# Allegro board avrusb500_3.brd
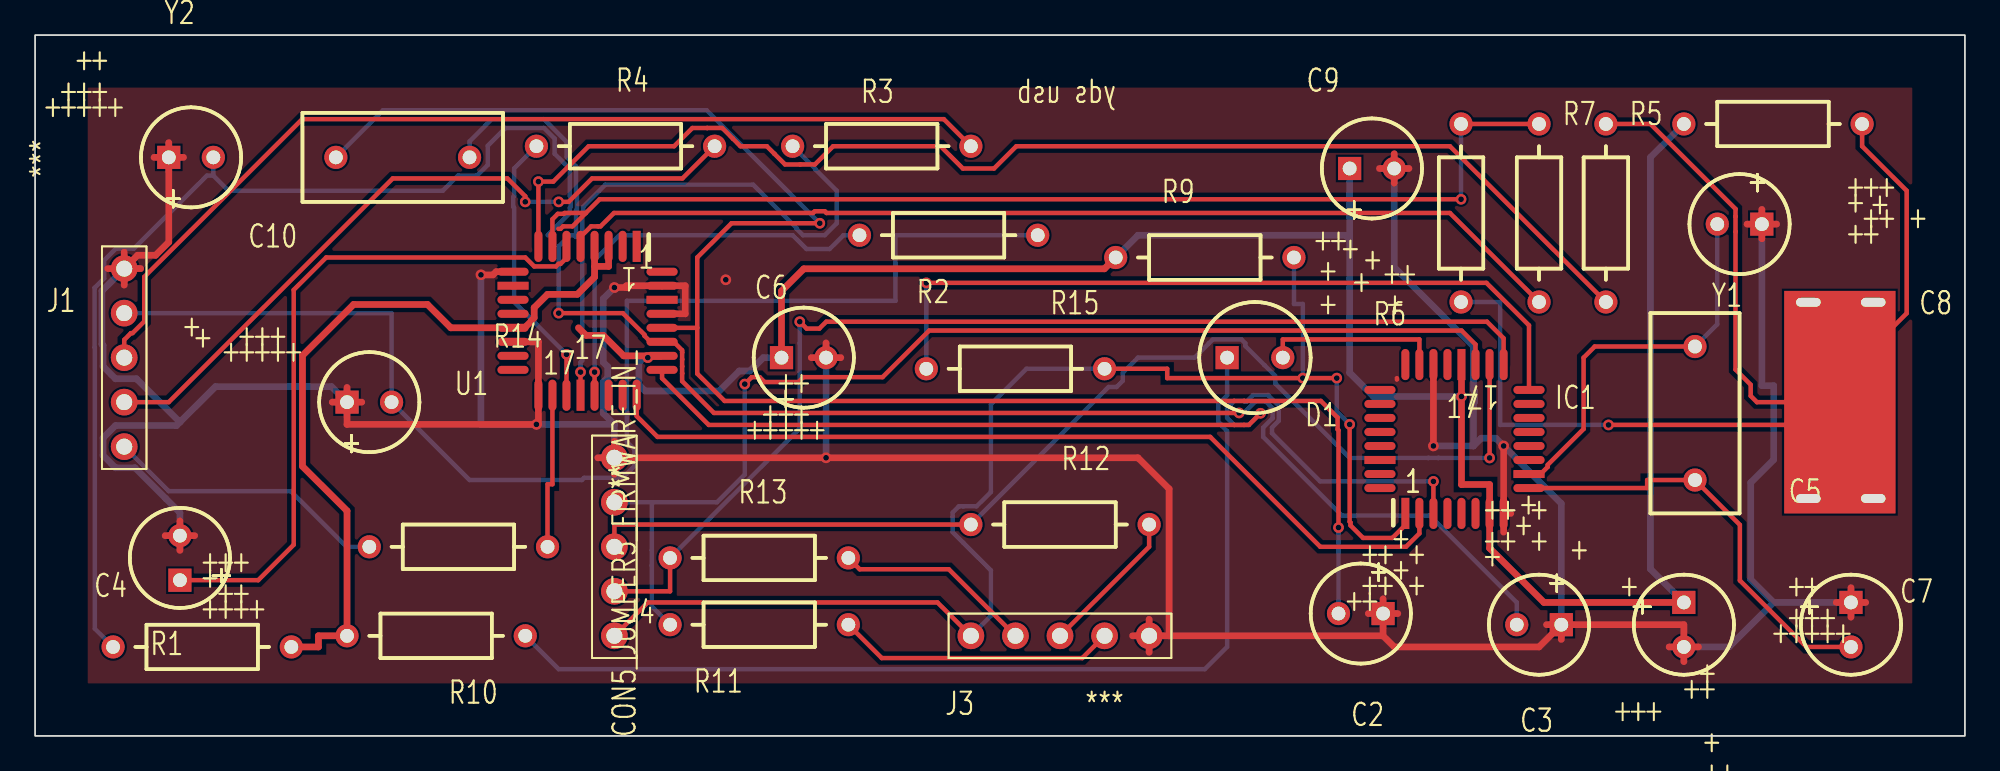
[diagram p0: board, top side]
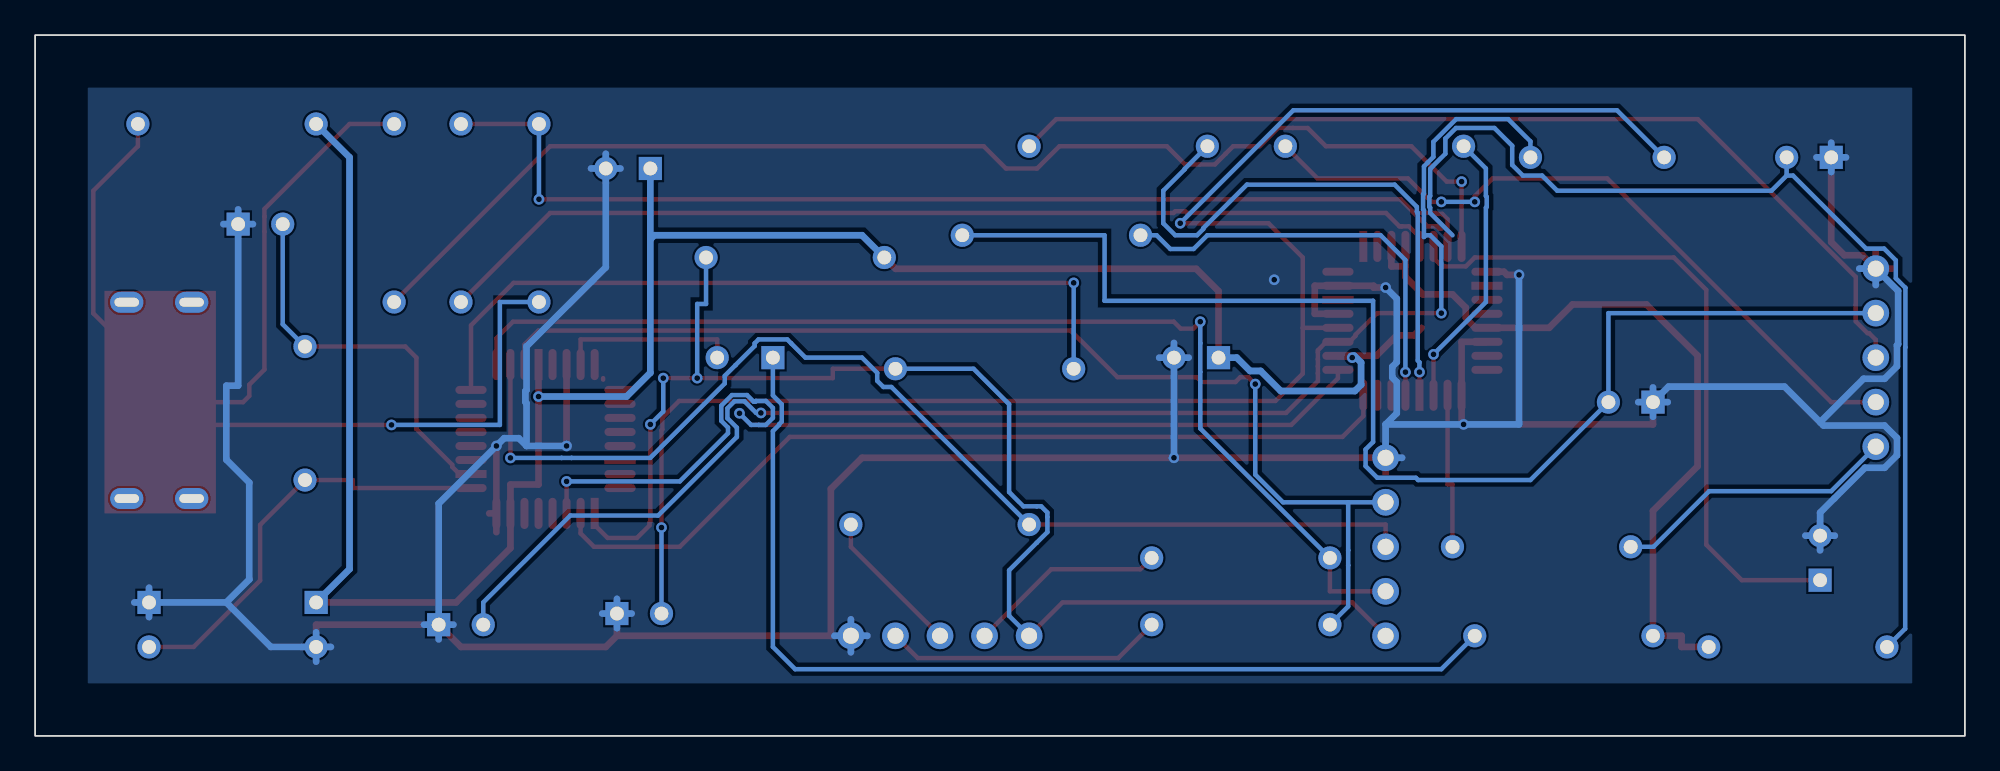
[diagram p1: board, bottom side, seen from below]

Outline 110 x 40 mm; copper layers: TOP, BOTTOM. Coordinates in mm from the lower left corner of the outline.
Outline path: rectangle 0,0 110,40

## Design rules (mm)
net group POWERNETS: nets VCC

## Placement (name value [footprint] x y rotation side)
C1  47nF  [CPCYL1D225LS100031]  7.62 33.02 0 top
C2  27pF  [CPCYL1D225LS100031]  76.83 6.99 180 top
C3  27pF  [CPCYL1D225LS100031]  87 6.35 180 top
C4  47nF  [CPCYL1D225LS100031]  8.26 8.89 90 top
C5  100nF  [CPCYL1D225LS100031]  93.98 7.62 270 top
C6  1uF  [CPCYL1D225LS100031]  42.55 21.59 0 top
C7  100nF  [CPCYL1D225LS100031]  103.5 7.62 270 top
C8  100nF  [CPCYL1D225LS100031]  98.42 29.21 180 top
C9  100nF  [CPCYL1D225LS100031]  74.93 32.38 0 top
C10  22nF  [CPCYL1D225LS100031]  17.78 19.05 0 top
D1  LED  [CYLD250LS125031]  67.94 21.59 0 top
IC1  ATmega8  [QUAD80M32WG900]  78.11 12.7 0 top
J1  bbpg_Bitbang  [JUMPER5]  5.08 16.51 90 top
J2  USBA  [MY_USB]  104.78 19.05 90 top
J3  avrusb500_out  [JUMPER5]  53.34 5.71 0 top
J4  firmware_in  [JUMPER5]  33.02 5.71 90 top
NOREF  -  []  110 0 90 top
NOREF#2  -  []  0 40 0 top
R1  470  [AX400X100031]  4.45 5.08 0 top
R2  220  [AX400X100031]  46.99 28.57 0 top
R3  220  [AX400X100031]  43.18 33.66 0 top
R4  220  [AX400X100031]  28.57 33.66 0 top
R5  27  [AX400X100031]  89.53 34.92 270 top
R6  27  [AX400X100031]  81.28 24.77 90 top
R7  1.5k  [AX400X100031]  85.72 34.92 270 top
R8  2.2  [AX400X100031]  104.14 34.92 180 top
R9  10k  [AX400X100031]  61.59 27.3 0 top
R10  470  [AX400X100031]  27.94 5.71 180 top
R11  1k  [AX400X100031]  36.2 6.35 0 top
R12  220  [AX400X100031]  53.34 12.06 0 top
R13  1k  [AX400X100031]  36.2 10.16 0 top
R14  220  [AX400X100031]  29.21 10.79 180 top
R15  220  [AX400X100031]  50.8 20.95 0 top
U1  FT232BM  [QUAD80M32WG900]  34.29 27.94 180 top
Y1  3.6864Mhz  [RAD450X200LS300031]  94.61 22.23 270 top
Y2  6Mhz  [RAD450X200LS300031]  17.14 33.02 0 top

## Library data of the parts
C1-C5 C7-C10 = CAPACITOR NON-POL: alternate symbols: (SMDCAP)
C6 = CAPACITOR POL: alternate symbols: (SMDCAP)
D1 = LED
IC1 = ATmega8-DIL28_2
J1 J3 J4 = CON5: User Part Number: ***
J2 = CON4_7
R1-R15 = R: alternate symbols: (SMDRES)
U1 = FT232BM_2: alternate symbols: (JEDECMS026)
Y1 Y2 = ZTA

## Footprints (pads in the part's own frame, mm; a bottom-side part is the same pattern mirrored in y, then rotated)
AX400X100031
  round 1.321 hole 0.787: 1(0,0) 2(10.16,0)
CPCYL1D225LS100031
  rect 1.321x1.321 hole 0.787: 1(0,0)
  round 1.321 hole 0.787: 2(2.54,0)
CYLD250LS125031
  rect 1.321x1.321 hole 0.787: 1(0,0)
  round 1.321 hole 0.787: 2(3.175,0)
JUMPER5
  round 1.524 hole 0.914: 1(0,0) 2(2.54,0) 3(5.08,0) 4(7.62,0) 5(10.16,0)
MY_USB
  oval 1.2x1.9 hole 0.5x1.4: (-5.5,3.7) (-5.5,0) (5.7,3.7) (5.7,0)
  rect 1.1x1.72 smd: (-3.9,3.7) (3.9,3.7)
  rect 0.4x1.72 smd: 1(-2.6,3.7) 2(-1.3,3.7) 3(0,3.7) 4(1.3,3.7) 5(2.6,3.7)
QUAD80M32WG900
  rect 0.457x1.778 smd: 1(0,0) 20(3.2,8.496)
  oval 0.457x1.778 smd: 2(0.8,0) 3(1.6,0) 4(2.4,0) 5(3.2,0) 6(4,0) 7(4.801,0) 8(5.601,0) 17(5.601,8.496) 18(4.801,8.496) 19(4,8.496) 21(2.4,8.496) 22(1.6,8.496) 23(0.8,8.496) 24(0,8.496)
  oval 1.778x0.457 smd: 9(7.048,1.448) 11(7.048,3.048) 12(7.048,3.848) 13(7.048,4.648) 14(7.048,5.448) 15(7.048,6.248) 16(7.048,7.048) 25(-1.448,7.048) 26(-1.448,6.248) 27(-1.448,5.448) 28(-1.448,4.648) 29(-1.448,3.848) 31(-1.448,2.248) 32(-1.448,1.448)
  rect 1.778x0.457 smd: 10(7.048,2.248) 30(-1.448,3.048)
RAD450X200LS300031
  round 1.321 hole 0.787: 1(0,0) 2(7.62,0)

## Nets
+5V: J2.4 R8.1
GND: C1.1 C2.1 C3.1 C4.2 C5.2 C6.2 C7.1 C8.1 C9.2 C10.1 IC1.8(GND) IC1.22(AGND) J1.5 J2.1 J3.5 J4.5 U1.9(GND) U1.14(PWRCTL) U1.17(GND1) U1.29(AGND) U1.31(TEST)
VCC: C5.1 C6.1 C9.1 IC1.7(VCC) IC1.20(AVCC) R1.2 R8.2 R9.1 R10.2 U1.3(VCC) U1.4(RESET#) U1.13(VCC-IO) U1.26(VCC1)
BMISO: J1.3 R3.2
BMOSI: J1.2 R4.2
BRESET: J1.1 R14.2
BSCK: C10.2 J1.4 R2.2
D+: J2.2 R6.1
D-: J2.3 R5.1
F_MISO: IC1.18((MISO) PB4) J4.3 R12.1
F_MOSI: IC1.17((OC2/MOSI) PB3) J4.2 R13.1
F_SCK: IC1.19((SCK) PB5) J4.4 R11.1
MISO: J3.3 R12.2
MOSI: J3.2 R13.2
RESET: IC1.1(PC6 (R\E\S\E\T\)) J3.1 J4.1 R9.2 R15.2
RXD: IC1.2(PD0 (RXD)) U1.24(RXD)
SCK: J3.4 R11.2
TXD: IC1.3(PD1 (TXD)) U1.25(TXD)
N02483: R6.2 R7.1 U1.7(USBDP)
N02615: R5.2 U1.8(USBDM)
N03527: C4.1 U1.6(3V3OUT)
N06839: R2.1 U1.21(DTR#)
N06967: R3.1 U1.20(DSR#)
N07033: R4.1 U1.19(DCD#)
N07247: R14.1 U1.18(RI#)
N11951: R7.2 U1.5(RSTOUT#)
N15182: C7.2 IC1.9(PB6 (XT1/TOSC1)) Y1.2
N15289: C8.2 IC1.10(PB7 (XT2/TOSC2)) Y1.1
N19734: D1.2(CATHODE) IC1.23((ADC0) PC0)
N20572: D1.1(ANODE) R10.1
N22544: IC1.16((SS/OC1B) PB2) R15.1
N41098: C3.2 U1.27(XTIN) Y2.2
N41106: C2.2 U1.28(XTOUT) Y2.1
N49165: C1.2 R1.1 U1.30(AVCC)

Pads without a net: IC1 4 5 6 11 12 13 14 15 21 24 25 26 27 28 29 30 31 32; J2 5; U1 1 2 10 11 12 15 16 22 23 32

## Via types
v1: diameter 0.61, hole 0.33, TOP to BOTTOM, 30 vias

## Routing (per net, layer and track width the routed paths; a pad name or vN(x,y) marks a point on that pad's centre or on a via; arc(x,y) is an arc through that point)
+5V: length 19.3
  TOP w0.254: R8.1 104.14,33.66 106.68,31.11 106.68,24.12 102.53,19.97 102.11,19.97 101.74,20.35 J2.4
GND: length 326.5
  TOP w0.254: 77.62,20.34 77.62,20.42
  TOP w0.381: 77.47,31.55 C9.2 ; C9.2 78.31,32.38 ; C9.2 76.63,32.38 ; C9.2 77.47,33.22 ; 97.59,29.21 C8.1 ; C8.1 98.42,30.05 ; C8.1 98.42,28.37 ; C8.1 99.26,29.21 ; U1.14 28.69,22.49 U1.17 28.69,17.78 v1(28.57,17.78) 17.78,17.78 C10.1 ; 16.94,19.05 C10.1 ; C10.1 17.78,19.89 ; C10.1 18.62,19.05 ; v1(33.02,25.59) 33.7,25.59 33.7,25.69 U1.31 37.06,25.69 37.06,24.09 U1.29 ; C2.1 77.67,6.99 ; C2.1 76,6.99 ; C2.1 76.83,7.82 ; C2.1 76.83,5.71 ; v1(25.42,26.31) 26.1,26.31 26.28,26.49 U1.9 ; 87,5.51 C3.1 ; C3.1 93.98,6.35 C5.2 ; C3.1 86.16,6.35 ; C3.1 85.72,5.08 77.47,5.08 76.83,5.71 ; J3.5 63.5,6.66 ; J3.5 63.5,4.78 ; J3.5 62.56,5.71 ; J3.5 64.64,5.71 ; 102.67,7.62 C7.1 ; C7.1 103.5,8.46 ; C7.1 104.34,7.62 ; C7.1 103.5,6.78 ; C5.2 93.98,4.24 ; C5.2 94.82,5.08 ; C5.2 93.14,5.08 ; 83.71,11.63 IC1.8 ; IC1.8 84.11,12.7 ; IC1.8 v1(83.71,16.55) ; IC1.22 v1(79.7,16.55) ; 8.26,10.59 C4.2 ; C4.2 8.26,12.27 ; C4.2 7.42,11.43 ; C4.2 9.09,11.43 ; J1.5 6.02,26.67 ; J1.5 4.14,26.67 ; J1.5 5.08,25.73 ; J1.5 5.84,27.43 6.87,27.43 7.62,28.19 C1.1 ; J1.5 5.08,27.61 ; 33.02,14.94 J4.5 ; J4.5 32.08,15.88 ; J4.5 v1(45.09,15.88) 62.87,15.88 64.64,14.1 64.64,5.71 ; J4.5 33.02,16.82 ; C1.1 8.46,33.02 ; C1.1 6.78,33.02 ; C1.1 7.62,33.86 ; 76.83,5.71 64.64,5.71 ; 44.25,21.59 C6.2 ; C6.2 45.92,21.59 ; C6.2 45.09,22.43
  BOTTOM w0.381: C7.1 103.5,8.46 ; C7.1 104.34,7.62 ; C7.1 103.5,6.78 ; C7.1 99.1,7.62 ; C1.1 7.62,33.86 ; C1.1 8.46,33.02 ; C1.1 6.78,33.02 ; C1.1 7.62,32.18 ; 81.99,16.55 82.43,16.99 83.27,16.99 v1(83.71,16.55) 87,13.26 C3.1 ; 81.99,16.55 81.99,19 82.05,19.06 82.05,19.68 81.99,19.74 81.99,22.23 77.47,26.74 C9.2 ; 81.99,16.55 v1(79.7,16.55) ; 97.59,29.21 C8.1 ; C8.1 99.26,29.21 ; C8.1 98.42,19.99 99.1,19.99 99.1,15.77 97.79,14.46 97.79,8.93 99.1,7.62 ; C8.1 98.42,30.05 ; C10.1 16.89,19.94 10.28,19.94 8.26,17.91 ; C10.1 17.78,19.89 ; C10.1 17.78,18.21 ; C10.1 16.94,19.05 ; C10.1 18.62,19.05 ; 33.02,17.78 J4.5 32.08,15.88 ; 33.02,17.78 v1(28.57,17.78) 25.42,17.78 v1(25.42,26.31) ; 33.02,17.78 32.38,18.41 32.38,20.2 32.64,20.45 32.64,21.07 32.38,21.33 32.38,24.95 v1(33.02,25.59) ; 93.98,4.24 C5.2 ; C5.2 96.56,5.08 99.1,7.62 ; C5.2 93.14,5.08 ; C5.2 93.98,5.92 ; C9.2 77.47,33.22 ; C9.2 78.31,32.38 ; C9.2 76.63,32.38 ; C2.1 77.67,6.99 ; C2.1 76.83,6.15 ; C2.1 76.83,7.82 ; C2.1 76,6.99 ; C4.2 9.09,11.43 ; C4.2 7.42,11.43 ; C4.2 8.26,12.74 7.45,13.55 5.69,15.3 4.58,15.3 3.87,16.01 3.87,17.01 4.58,17.72 8.06,17.72 8.26,17.91 ; C4.2 8.26,10.59 ; 62.56,5.71 J3.5 ; J3.5 63.5,4.78 ; J3.5 63.5,6.66 ; J3.5 64.44,5.71 ; J1.5 3.81,25.4 3.81,22.35 3.87,22.29 3.87,21.09 4.58,20.38 5.78,20.38 8.26,17.91 ; J1.5 5.08,25.73 ; J1.5 6.02,26.67 ; 87,5.51 C3.1 ; C3.1 87.83,6.35 ; C3.1 86.16,6.35 ; C6.2 45.09,22.43 ; C6.2 44.25,21.59 ; C6.2 v1(45.09,15.88) ; C6.2 45.92,21.59
  vias: v1(39.37,26.04)
VCC: length 170.5
  TOP w0.381: C6.1 42.55,25.39 43.81,26.66 60.95,26.66 R9.1 ; 30.97,23.29 31.41,22.86 32.38,22.86 33.55,21.69 U1.26 ; C5.1 86,7.62 82.91,10.72 IC1.7 82.91,14.35 81.31,14.35 v1(81.31,19.37) IC1.20 ; 31.89,26.8 31.89,26.19 30.91,25.2 29.21,25.2 28.45,24.44 28.45,23.87 28.29,23.71 28.29,23.68 27.9,23.29 U1.13 23.7,23.29 22.36,24.63 18.16,24.63 15.24,21.71 15.24,15.39 17.78,12.85 R10.2 16.15,5.71 16.15,5.08 R1.2 ; 31.89,26.8 32.69,26.8 U1.3 ; 31.89,26.8 U1.4
  BOTTOM w0.381: v1(34.92,21.59) 34.82,21.69 34.8,21.69 34.42,21.31 34.42,20.04 34.77,19.68 39,19.68 40.14,20.83 40.74,20.83 41.5,21.59 C6.1 ; 74.93,28.35 74.7,28.57 62.87,28.57 R9.1 ; 74.93,28.35 74.93,20.73 76.29,19.37 v1(81.31,19.37) ; 74.93,28.35 C9.1 ; C5.1 92.08,9.53 92.08,33.02 R8.2
BMISO: length 56.6
  TOP w0.254: R3.2 51.79,35.2 15.23,35.2 6.22,26.2 6.22,24.6 6.22,23.66 5.55,22.99 5.46,22.99 5.08,22.61 J1.3
BMOSI: length 41
  TOP w0.254: J1.2 7.62,19.05 20.39,31.82 26.92,31.82 27.94,30.8 v1(27.94,30.48) ; R4.2 36.9,31.82 31.75,31.82 30.41,30.48 v1(29.84,30.48)
  BOTTOM w0.254: v1(27.94,30.48) v1(29.84,30.48)
BRESET: length 16.3
  BOTTOM w0.254: R14.2 17.75,10.79 14.58,13.97 7.62,13.97 J1.1
BSCK: length 73.1
  BOTTOM w0.254: R2.2 49.04,28.57 49.04,24.83 33.73,24.83 33.73,16.78 34.16,16.35 34.16,15.4 33.49,14.73 31.29,14.73 31.17,14.61 24.77,14.61 C10.2 20.32,24.13 J1.4
D+: length 26.8
  TOP w0.254: J2.2 v1(89.69,17.75)
  BOTTOM w0.254: v1(89.69,17.75) 83.51,17.75 83.51,24.77 R6.1
D-: length 23.9
  TOP w0.254: R5.1 92.08,34.92 96.93,30.07 96.93,29.64 96.93,20.91 97.79,20.04 97.79,19.4 98.14,19.05 J2.3
F_MISO: length 64.3
  TOP w0.254: IC1.18 v1(82.91,15.87) ; J4.3 33.02,12.06 R12.1
  BOTTOM w0.254: R12.1 61.19,19.91 61.65,19.91 62,20.27 62,20.73 62.87,21.59 66.09,21.59 66.9,22.41 67.13,22.63 68.76,22.63 68.99,22.41 68.99,22.25 70.08,21.16 70.08,21.16 70.69,20.55 70.69,20.12 74.94,15.87 79.42,15.87 79.42,15.87 79.99,15.87 79.99,15.87 v1(82.91,15.87)
F_MOSI: length 64
  TOP w0.254: R13.1 36.2,8.26 33.02,8.26 ; IC1.17 83.71,22.69 82.76,23.64 45.1,23.64 44.7,23.25 43.98,23.25 v1(43.59,23.64)
  BOTTOM w0.254: v1(43.59,23.64) 43.59,22.41 43.59,17.55 R13.1
F_SCK: length 65.3
  TOP w0.254: IC1.19 82.11,22.34 81.31,23.14 50.97,23.14 48.31,20.48 43.79,20.48 43.51,20.2 41.58,20.2 41.3,20.48 40.85,20.48 v1(40.45,20.08)
  BOTTOM w0.254: R11.1 35.15,7.39 35.15,9.73 35.15,13.34 ; 35.15,13.34 38.87,13.34 40.45,14.92 v1(40.45,20.08) ; 35.15,13.34 J4.4
MISO: length 8.5
  TOP w0.254: R12.2 63.5,10.79 J3.3
MOSI: length 11.4
  TOP w0.254: J3.2 52.08,9.51 47,9.51 R13.2
RESET: length 79.6
  TOP w0.254: J3.1 51.44,7.62 34.92,7.62 J4.1 ; R15.2 64.53,20.95 64.53,20.42 v1(72.26,20.42) v1(74.19,20.42) ; IC1.1 78.11,12.04 77.37,11.3 75.69,11.3 74.98,12.02 74.98,12.18 74.93,12.23 v1(74.93,17.78)
  BOTTOM w0.254: v1(72.26,20.42) 72.26,24.65 71.75,24.65 R9.2 ; v1(74.93,17.78) 74.19,18.52 v1(74.19,20.42) ; R15.2 56.51,20.95 54.48,18.93 54.48,13.92 53.66,13.11 52.91,13.11 52.65,13.11 52.3,12.75 52.3,12.5 52.3,11.63 52.91,11.02 52.91,11.02 54.48,9.45 54.48,6.86 J3.1
RXD: length 50.4
  TOP w0.254: IC1.2 78.91,11.56 78.14,10.79 73.25,10.79 66.98,17.07 35.48,17.07 34.29,18.25 U1.24
SCK: length 15.9
  TOP w0.254: R11.2 48.26,4.45 59.69,4.45 J3.4
TXD: length 56.3
  TOP w0.254: v1(69.85,18.41) 69.18,17.75 68.91,17.75 68.91,17.75 68.35,17.75 38.4,17.75 35.74,20.41 U1.25 ; IC1.3 v1(79.7,14.53)
  BOTTOM w0.254: v1(79.7,14.53) 73.25,14.53 70.5,17.27 70.5,17.6 70.89,17.98 70.89,18.85 70.28,19.45 69.42,19.45 69.04,19.08 68.96,19.08 68.91,19.12 68.35,19.12 67.94,18.72 67.94,18.15 68.35,17.75 68.75,17.75 69.18,17.75 v1(69.85,18.41)
N02483: length 64.5
  TOP w0.254: R7.1 R6.2 ; U1.7 29.49,29.49 29.8,29.8 30.13,29.8 30.18,29.84 31.39,29.84 ; 31.39,29.84 32.18,30.63 v1(81.28,30.63) ; 31.39,29.84 30.63,29.08 30.09,29.08 29.95,28.94 29.83,28.94
  BOTTOM w0.254: v1(81.28,30.63) R6.2
N02615: length 71.8
  TOP w0.254: U1.8 v1(28.69,31.64) 29.53,31.64 31.55,33.66 36.42,33.66 37.47,34.7 38.3,34.7 39.17,34.7 39.78,34.09 40.21,33.66 41.71,33.66 42.14,33.22 42.75,32.61 43.61,32.61 44.45,32.61 45.49,33.66 51.61,33.66 52.88,32.38 54.66,32.38 55.93,33.66 80.64,33.66 R5.2
N03527: length 39.3
  TOP w0.254: C4.1 12.72,8.89 14.74,10.91 14.74,25.46 16.59,27.3 27.94,27.3 28.45,26.8 29.69,26.8 29.83,26.94 29.95,26.94 30.29,27.28 U1.6
N06839: length 24.1
  TOP w0.254: U1.21 v1(31.89,20.76)
  BOTTOM w0.254: R2.1 46.08,28.57 45.29,27.79 43.96,27.79 43.18,28.57 33.31,28.57 31.89,27.16 v1(31.89,20.76)
N06967: length 32.7
  TOP w0.254: U1.20 v1(31.09,20.76)
  BOTTOM w0.254: v1(31.09,20.76) 31.09,21.32 31.19,21.42 31.19,29.85 31.24,29.9 31.24,30.19 32.51,31.46 40.93,31.46 43.41,28.98 43.41,28.93 43.77,28.57 45.01,28.57 45.69,29.26 45.69,31.11 44.47,32.34 44.47,32.36 R3.1
N07033: length 16
  TOP w0.254: U1.19 v1(30.29,21.78)
  BOTTOM w0.254: v1(30.29,21.78) 27.3,24.76 27.3,30.15 27.26,30.2 27.26,30.76 27.3,30.81 27.3,32.38 R4.1
N07247: length 8.9
  TOP w0.254: U1.18 29.49,14.37 29.21,14.37 R14.1
N11951: length 57.9
  TOP w0.254: U1.5 31.09,28.48 31.69,29.08 32.09,29.08 32.09,29.08 32.23,29.08 32.99,29.84 44.34,29.84 44.44,29.94 45.01,29.94 45.11,29.84 80.64,29.84 R7.2
N15182: length 24.6
  TOP w0.254: IC1.9 91.89,14.15 91.89,14.61 Y1.2 97.17,12.05 97.17,8.87 100.97,5.08 C7.2
N15289: length 22.4
  TOP w0.254: Y1.1 88.9,22.23 88.27,21.59 88.27,17.52 86.22,15.47 86.22,15.36 85.81,14.95 IC1.10
  BOTTOM w0.254: C8.2 95.89,23.5 Y1.1
N19734: length 10.3
  TOP w0.254: D1.2 71.12,22.63 78.91,22.63 IC1.23
N20572: length 58.2
  BOTTOM w0.254: D1.1 67.94,19.43 67.44,18.93 67.44,17.94 67.59,17.79 67.59,17.75 67.94,17.4 67.94,5.08 66.67,3.81 29.84,3.81 R10.1
N22544: length 43.9
  TOP w0.254: IC1.16 85.15,23.43 82.73,25.86 v1(50.8,25.86)
  BOTTOM w0.254: R15.1 v1(50.8,25.86)
N41098: length 84.4
  TOP w0.254: v1(68.63,18.43) 38.7,18.43 36.88,20.25 36.88,20.69 36.88,21.49 36.88,22.01 36.4,22.49 U1.27 35.08,22.49 34.74,22.83 34.74,22.9 33.5,24.13 v1(29.84,24.13)
  BOTTOM w0.254: C3.2 84.45,7.62 79.5,12.58 74.48,12.58 70,17.07 70,17.59 70.53,18.13 70.53,18.7 70.13,19.1 69.57,19.1 68.9,18.43 v1(68.63,18.43) ; Y2.2 24.77,33.93 26.03,35.2 29,35.2 30.3,33.9 30.3,33.04 30.63,32.71 30.83,32.51 30.83,30.96 30.88,30.91 30.88,30.05 30.83,30 30.83,28.47 30.73,28.57 30.48,28.57 29.84,27.94 v1(29.84,24.13)
N41106: length 96.5
  TOP w0.254: 37.74,23.29 37.74,20.68 39.3,19.12 68.35,19.12 68.91,19.12 68.91,19.12 73.29,19.12 74.25,18.16 74.25,17.5 74.3,17.45 v1(74.3,11.89) ; 37.74,23.29 37.74,27.31 39.7,29.26 v1(44.73,29.26) ; 37.74,23.29 U1.28
  BOTTOM w0.254: 74.3,6.99 v1(74.3,11.89) ; Y2.1 19.83,35.71 38.28,35.71 v1(44.73,29.26)
N49165: length 60.6
  BOTTOM w0.254: 29.21,28.57 30.48,29.84 30.48,30.15 30.53,30.2 30.53,30.76 30.48,30.81 30.48,32.36 29.62,33.22 29.62,34.09 29.01,34.7 26.82,34.7 25.81,33.68 25.81,32.59 25.2,31.98 24.1,31.98 23.24,31.11 11.02,31.11 10.16,31.98 ; 10.16,31.98 C1.2 ; 10.16,31.98 9.8,31.98 5.63,27.81 4.61,27.81 3.94,27.14 3.94,26.12 3.39,25.57 3.39,22.18 3.4,22.17 3.4,6.12 R1.1

## Copper pours and planes (outline as drawn; the poured copper is in the pictures)
+5V on TOP (solid shape): 106.05,12.7 99.69,12.7 99.69,25.4 106.05,25.4
GND on TOP, BOTTOM: 3,3 3,37 107,37 107,3

## Text on the board
Ref Des/Silkscreen Top: yds usb
DIMENSION: FIGURE | SIZE | 0.3302 | 0.7869 | 0.9144 | 1.4x0.5001 | DRILL CHART: TOP to BOTTOM | ALL UNITS ARE IN MILLIMETERS | PLATED | QTY | 30 | 56 | 15 | 4
